# EAGLE board protractor (EAGLE 7.5.0)
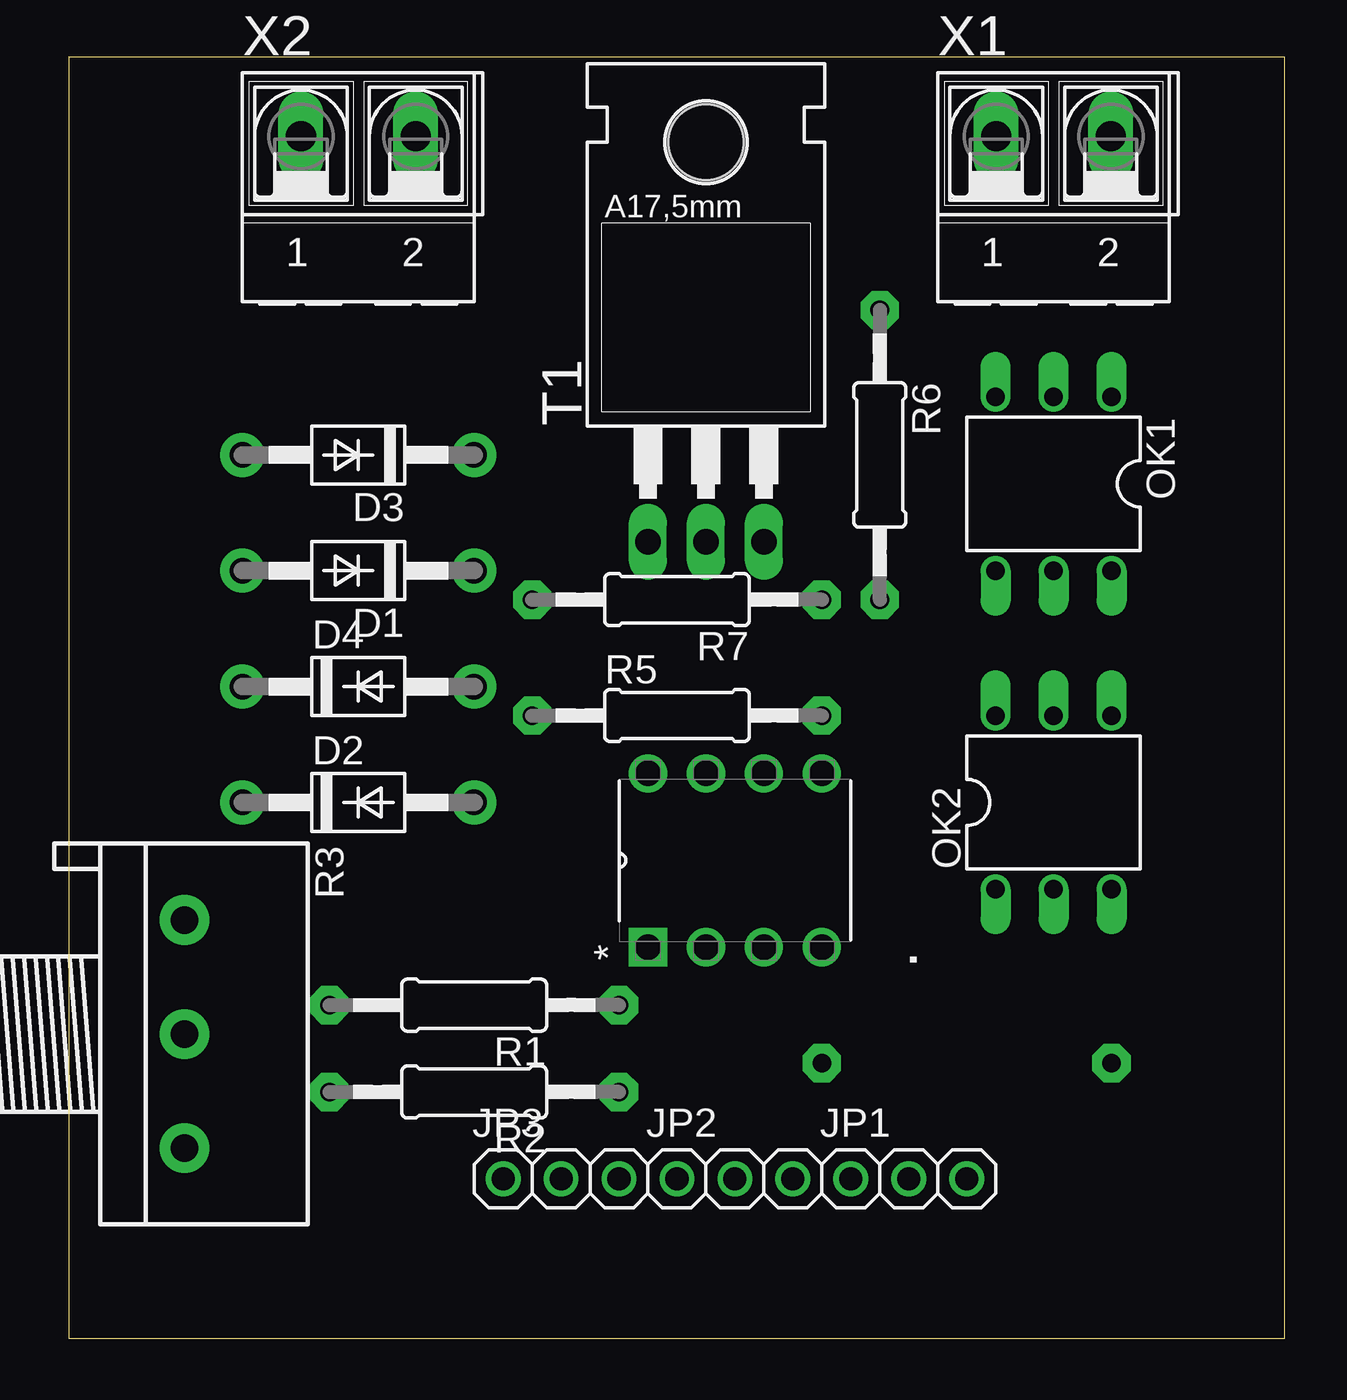
[diagram p0: board, top side]
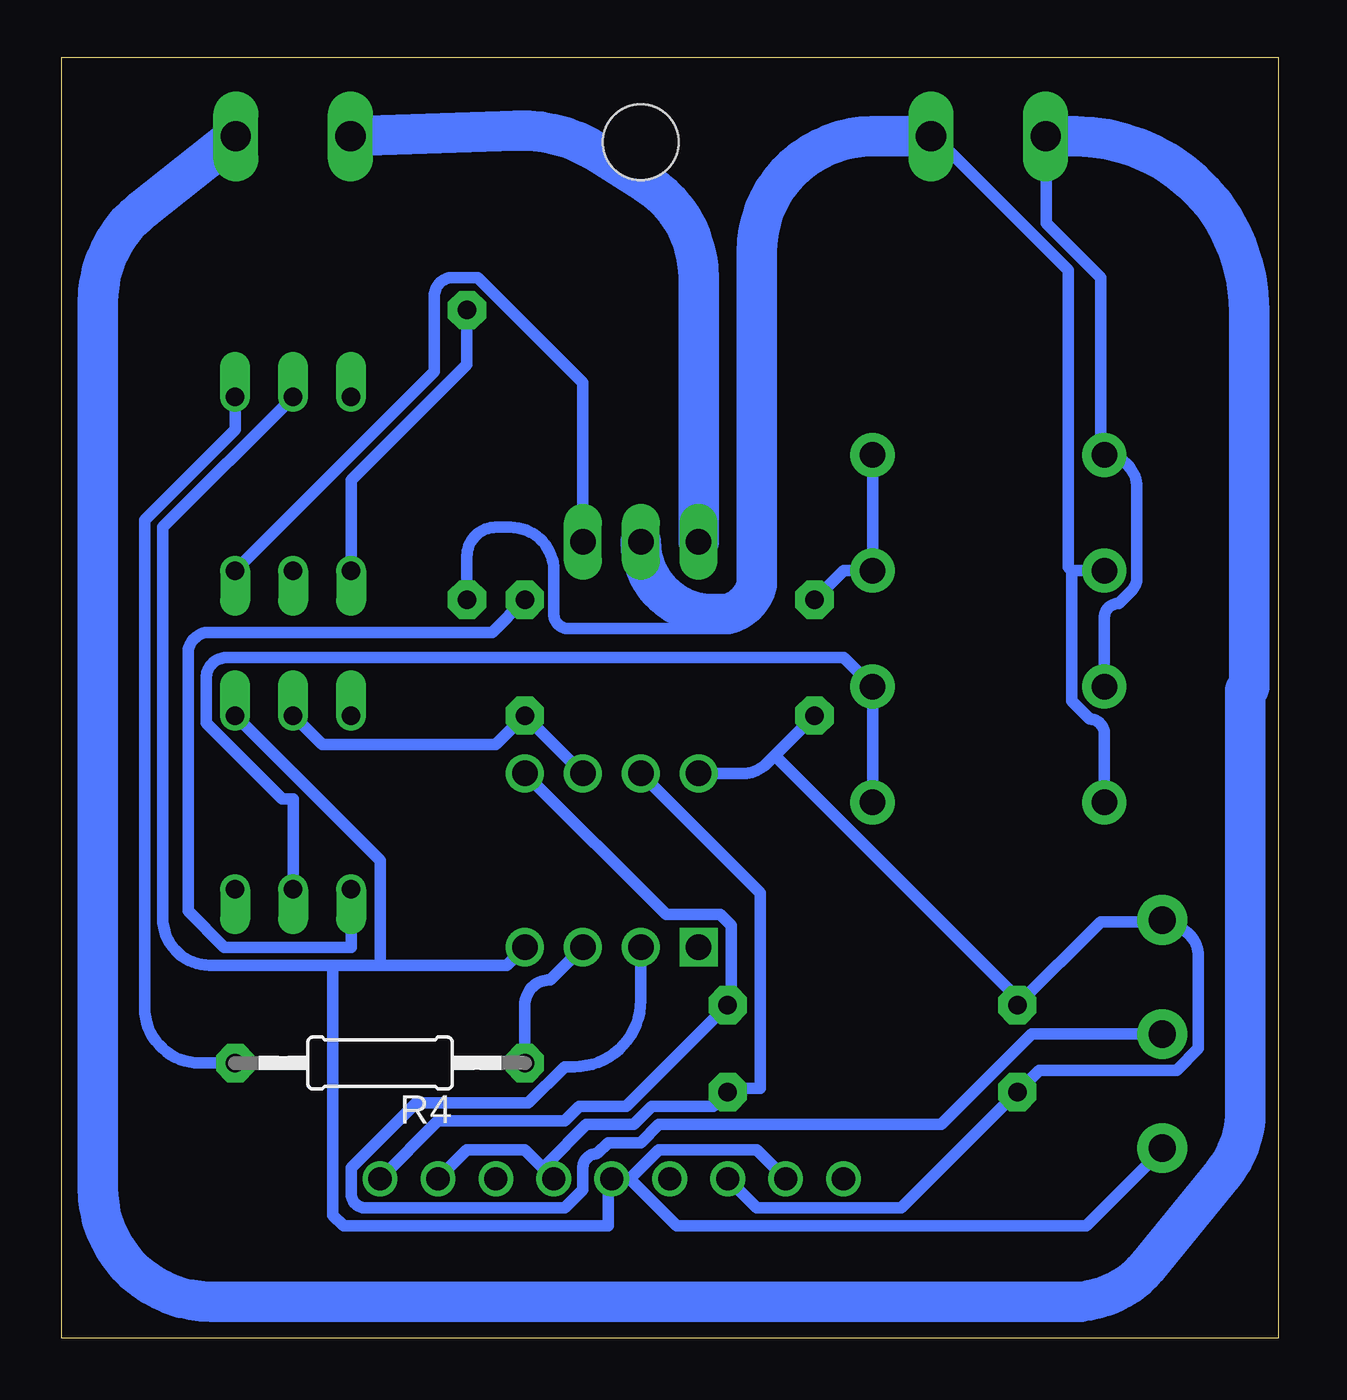
[diagram p1: board, bottom side, seen from below]

Size 53.32 x 56.19 mm. Coordinates in mm from the lower left corner, seen from the top.
Outline: 0,0 53.32,0 53.32,56.19 0,56.19 0,0
Copper layers (1*16): Top 0.035mm / dielectric 1.5mm / Bottom 0.035mm
Design rules "default *": minimum track width 20mil, minimum drill 24mil, track to track 8mil, track to pad 8mil, pad to pad 8mil, via to via 8mil, smd to smd 8mil, copper to edge 40mil, drill to drill 8mil, minimum pad ring 10mil, minimum via ring 8mil, stop-mask expansion 4mil, vias tented up to drill 0mil, thermal gap 10mil

## Footprints (pad centres in the part's own frame; a part is rotated, then mirrored left to right if it is on the bottom)
DIP254P762X533-8 = drill 1.118 square: 1 -7.62,7.62 | drill 1.118: 2 -7.62,5.08; 3 -7.62,2.54; 4 -7.62,0; 5 0,0; 6 0,2.54; 7 0,5.08; 8 0,7.62
DO41-10 = drill 1.118 pad 1.93: A 5.08,0; C -5.08,0
1X03 = drill 1.016: 1 -2.54,0; 2 0,0; 3 2.54,0
DIL06 = drill 0.813 offset: 1 -2.54,-3.81; 2 0,-3.81; 3 2.54,-3.81; 4 2.54,3.81; 5 0,3.81; 6 -2.54,3.81
0207/12 = drill 0.813 pad 1.676 octagon: 1 -6.35,0; 2 6.35,0
3RP/1610N = drill 1.2 pad 2.184: 1 -5,0; 2 0,0; 3 5,0
TO220AB = drill 1.118 long: 1 -2.54,-6.35; 2 0,-6.35; 3 2.54,-6.35 | hole 3.302: 0,11.176
AK500/2-H = drill 1.321 long: 1 -2.515,0; 2 2.515,0

## Placement (x,y rotation side)
.  attiny  [DIP254P762X533-8]  33.02,24.77 90 top
D1  1N4004  [DO41-10]  12.7,33.66 180 top
D2  1N4004  [DO41-10]  12.7,23.5 0 top
D3  1N4004  [DO41-10]  12.7,38.73 180 top
D4  1N4004  [DO41-10]  12.7,28.58 0 top
JP1  [1X03]  36.83,6.98 0 top
JP2  [1X03]  29.21,6.98 0 top
JP3  [1X03]  21.59,6.98 0 top
OK1  MOC3021M  [DIL06]  43.18,37.47 180 top
OK2  4N25M  [DIL06]  43.18,23.5 0 top
R1  4.7k  [0207/12]  17.78,14.61 180 top
R2  4.7k  [0207/12]  17.78,10.8 180 top
R3  [3RP/1610N]  5.08,13.34 270 top
R4  330  [0207/12]  39.37,12.07 180 bottom
R5  1k  [0207/12]  26.67,27.31 0 top
R6  1k  [0207/12]  35.56,38.73 270 top
R7  30k  [0207/12]  26.67,32.39 180 top
T1  BT136  [TO220AB]  27.94,41.28 0 top
X1  [AK500/2-H]  43.18,52.7 0 top
X2  [AK500/2-H]  12.7,52.7 0 top

## Library data of the parts
. = Atmel_By_element14_Batch_1-00; MPN: ATTINY45-20PU; OC_FARNELL: 1288352; OC_NEWARK: 23M5072; PACKAGE: PDIP-8; SUPPLIER: Atmel
D1-D4 JP1-JP3 R1 R2 R4-R7 = adafruit
OK1 = optocoupler; MF: FAIRCHILD SEMICONDUCTOR; MPN: MOC3021-M; OC_FARNELL: 1021365; OC_NEWARK: 95B7895
OK2 = optocoupler; MPN: 4N25-M; OC_FARNELL: 1021349; OC_NEWARK: 98K9084
R3 = pot
T1 = triac
X1 X2 = con-ptr500; OC_FARNELL: unknown; OC_NEWARK: unknown

## Nets
GND: ..4 JP2.2 JP3.2 OK1.2 OK2.4 R3.3
N$1: D2.A D4.A OK2.2
N$2: D1.C D3.C R7.2
N$3: D3.A D4.C X1.2 X2.1
N$4: D1.A D2.C R6.2 T1.2 X2.2
N$5: OK2.1 R7.1
N$6: OK1.6 T1.3
N$7: OK1.4 R6.1
N$8: T1.1 X1.1
N$9: ..2 R3.2
N$10: ..6 OK2.5 R5.2
N$11: ..5 JP1.3 R1.1
N$12: ..3 R4.1
N$13: OK1.1 R4.2
N$14: ..7 JP1.2 JP2.3 R2.1
VCC: ..8 JP3.3 R1.2 R2.2 R3.1 R5.1

## Tracks (layer width: path | path; a pad name or v marks a point on that pad's centre or on a via)
GND
  Bottom 0.508: JP3.2 22.86,8.26 27.15,8.26 28.42,6.98 | 28.42,6.98 JP2.2 29.37,6.83 29.37,4.92 40.96,4.92 41.43,5.4 41.43,16.35 | 28.42,6.98 26.35,4.92 8.41,4.92 5.08,8.26 R3.3 | OK1.2 48.89,35.56 48.89,18.41 arc-90 46.83,16.35 41.43,16.35 | 39.37,16.35 33.81,16.35 ..4 | 39.37,16.35 41.43,16.35 | OK2.4 39.37,20.95 39.37,16.35
N$1
  Bottom 0.508: OK2.2 43.18,23.65 43.66,23.65 46.99,26.99 46.99,28.95 arc90 46.09,29.84 19.05,29.84 D4.A D2.A
N$2
  Bottom 0.508: R7.2 19.05,33.66 D1.C D3.C
N$3
  Bottom 0.508: X2.1 10.16,52.7 10.16,48.89 7.78,46.51 7.78,38.89 D3.A arc90 6.19,37.31 6.19,33.35 arc45 6.42,32.79 6.98,32.23 arc-90 7.62,31.59 D4.C 7.46,28.42 | 45.72,52.7 X1.2
  Bottom 1.778: 45.72,52.7 49.75,49.52 arc-52 51.75,45.4 51.75,6.61 arc-90 46.73,1.59 9.04,1.59 arc-51 5.69,3.18 2.42,7.19 arc-39 1.43,9.99 1.43,28.42 arc-90 1.27,28.58 1.27,45.09 arc-90 8.89,52.7 X2.1
N$4
  Bottom 0.508: D2.C 7.62,26.51 arc-90 8.25,27.15 9.05,27.94 9.05,33.66 | D1.A 9.05,33.66 | X2.2 15.08,52.7 9.21,46.83 9.21,33.81 9.05,33.66 | R6.2 35.56,34.29 arc90 34.29,35.56 33.66,35.56 arc90 31.75,33.66 31.75,31.75 arc-90 31.11,31.12 24.77,31.12 24.77,31.75
  Bottom 1.778: X2.2 17.78,52.7 arc-90 22.86,47.62 22.86,33.02 arc60 24.13,31.75 24.77,31.75 arc90 T1.2
N$5
  Bottom 0.508: OK2.1 40.64,17.15 46.2,17.15 47.78,18.73 47.78,30.03 arc90 46.86,30.96 34.45,30.96 R7.1
N$6
  Bottom 0.508: OK1.6 36.99,42.39 36.99,45.7 arc90 36.18,46.51 35.08,46.51 30.48,41.91 T1.3
N$7
  Bottom 0.508: OK1.4 40.64,37.62 35.56,42.7 R6.1
N$8
  Bottom 0.508: 40.64,52.7 X1.1
  Bottom 1.778: 40.64,52.7 33.41,52.95 arc34 29.76,51.97 27.72,50.67 arc58 25.4,46.47 T1.1
N$9
  Bottom 0.508: ..2 27.94,14.82 arc90 30.85,11.91 31.27,11.91 32.86,10.32 37.78,10.32 40.64,7.46 40.64,6.35 arc-90 40,5.72 31.27,5.72 30.48,6.51 30.48,7.46 arc90 29.84,8.1 29.37,8.57 27.94,8.57 27.15,9.37 14.76,9.37 10.79,13.34 R3.2
N$10
  Bottom 0.508: OK2.5 41.91,26.03 34.29,26.03 R5.2 ..6
N$11
  Bottom 0.508: JP1.3 36.83,9.53 31.27,9.53 30.64,10.16 28.58,10.16 R1.1 23.97,14.76 23.97,18.1 24.45,18.57 26.83,18.57 ..5
N$12
  Bottom 0.508: R4.1 33.02,14.61 arc90 31.91,15.72 ..3
N$13
  Bottom 0.508: OK1.1 45.72,39.85 49.69,35.88 49.69,14.49 arc-90 47.27,12.07 R4.2
N$14
  Bottom 0.508: JP1.2 35.56,8.26 33.02,8.26 JP2.3 32.07,7.62 30.32,9.37 28.26,9.37 27.46,10.16 24.77,10.16 R2.1 23.97,10.95 22.7,10.95 22.7,19.53 ..7
VCC
  Bottom 0.508: JP3.3 22.86,5.72 16.51,5.72 R2.2 10.48,11.75 4.45,11.75 3.49,12.7 3.49,16.75 arc-90 4.84,18.1 4.92,18.1 R3.1 5.08,18.26 7.78,18.26 R1.2 11.43,14.92 22.07,25.56 | ..8 23.45,24.77 arc-45 22.44,25.18 22.07,25.56 | 22.07,25.56 R5.1